# EAGLE board sensor (EAGLE 9.6.2)
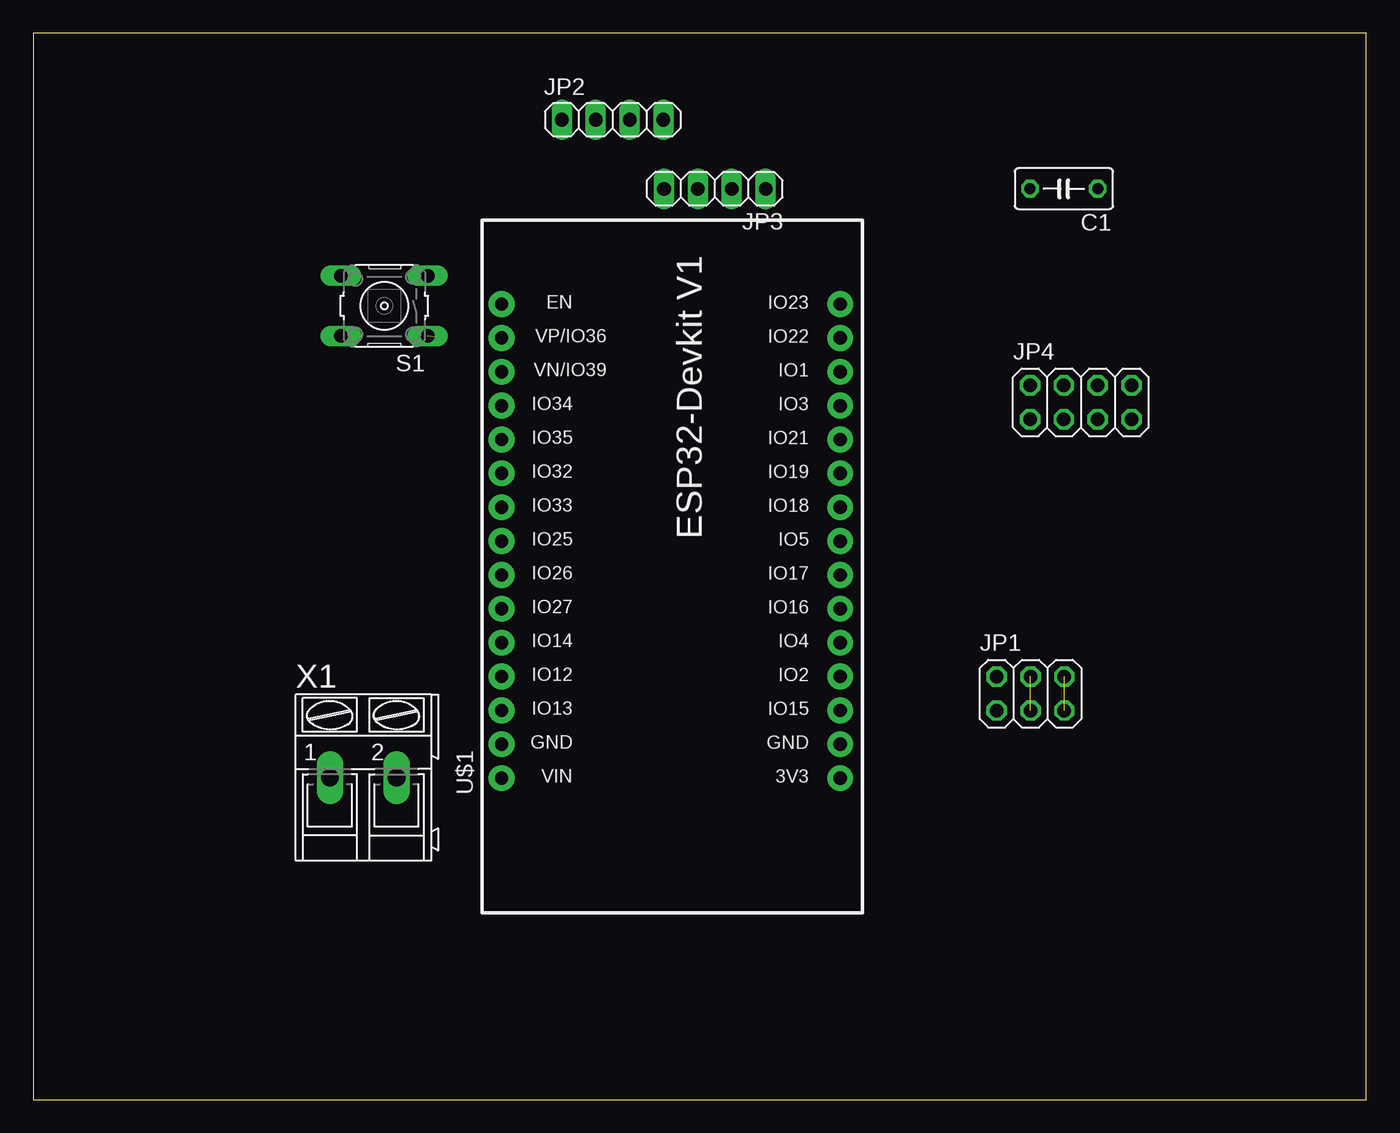
[diagram p0: board, top side]
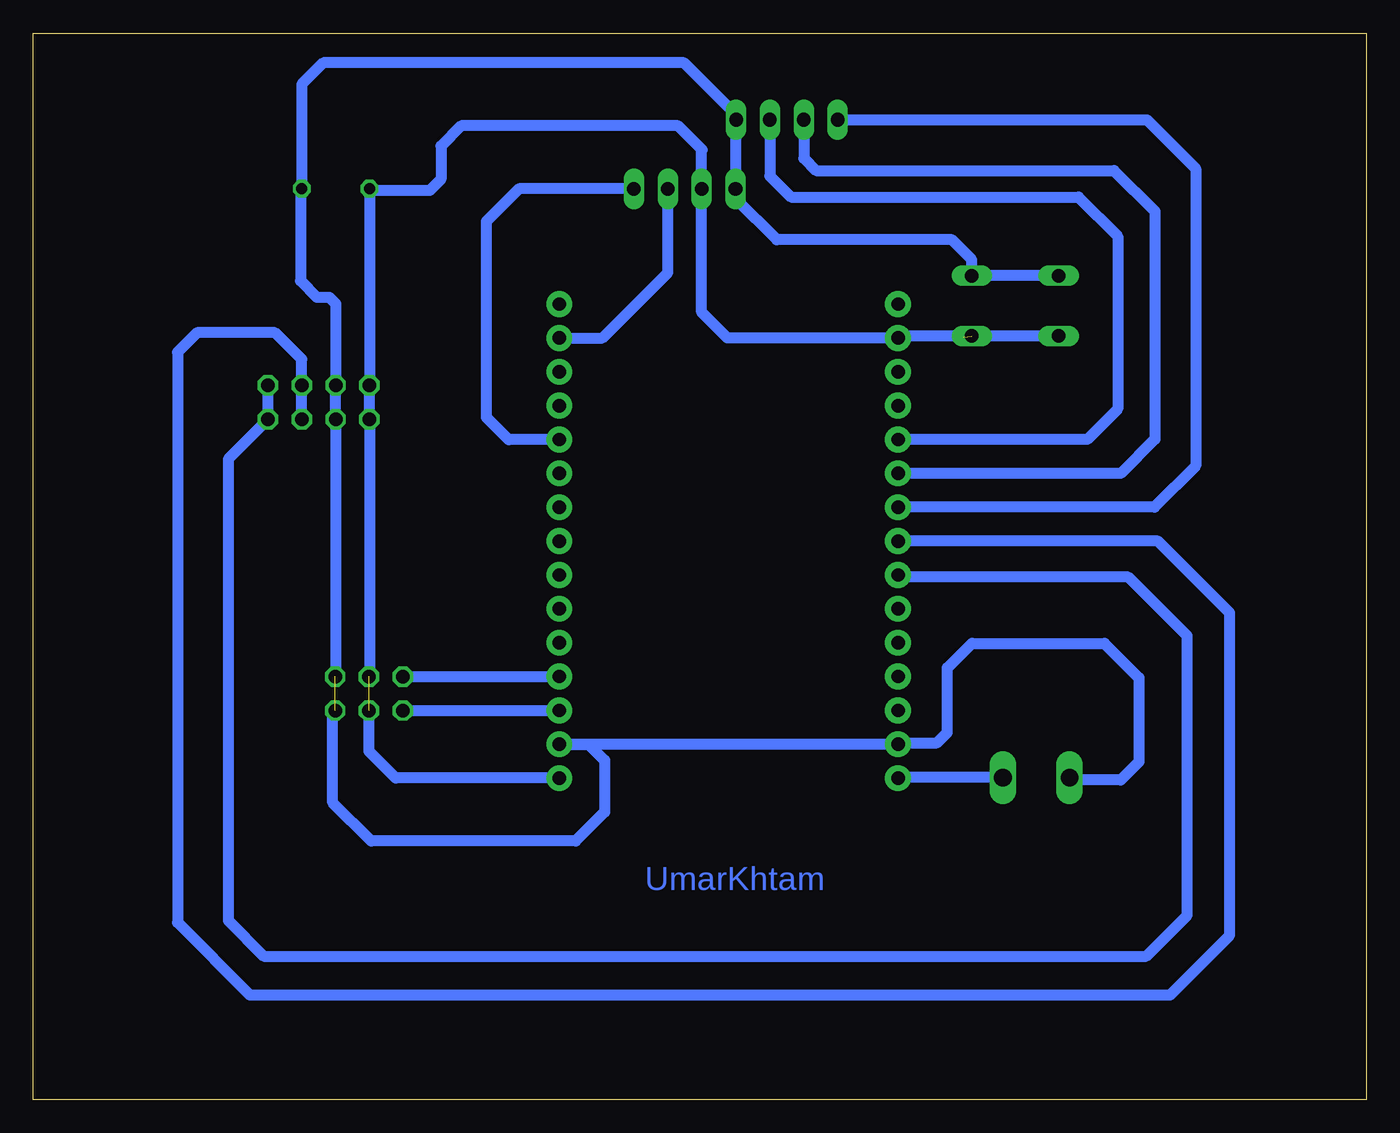
[diagram p1: board, bottom side, seen from below]

Size 100 x 80 mm. Coordinates in mm from the lower left corner, seen from the top.
Outline: 0,0 100,0 100,80 0,80 0,0
Copper layers (1*16): Top 0.035mm / dielectric 1.5mm / Bottom 0.035mm
Design rules "default": minimum track width 6mil, minimum drill 0.35mm, track to track 6mil, track to pad 6mil, pad to pad 6mil, via to via 6mil, smd to smd 6mil, copper to edge 40mil, drill to drill 6mil, minimum pad ring 10mil, minimum via ring 8mil, stop-mask expansion 4mil, vias tented up to drill 0mil, thermal gap 10mil

## Footprints (pad centres in the part's own frame; a part is rotated, then mirrored left to right if it is on the bottom)
C050-030X075 = drill 0.813 octagon: 1 -2.54,0; 2 2.54,0
2X03 = drill 1.016 octagon: 1 -2.54,-1.27; 2 -2.54,1.27; 3 0,-1.27; 4 0,1.27; 5 2.54,-1.27; 6 2.54,1.27
1X04 = drill 1.016 long: 1 -3.81,0; 2 -1.27,0; 3 1.27,0; 4 3.81,0
2X04 = drill 1.016 octagon: 1 -3.81,-1.27; 2 -3.81,1.27; 3 -1.27,-1.27; 4 -1.27,1.27; 5 1.27,-1.27; 6 1.27,1.27; 7 3.81,-1.27; 8 3.81,1.27
B3F-10XX = drill 1.016 long: 1 -3.251,2.261; 2 3.251,2.261; 3 -3.251,-2.261; 4 3.251,-2.261
ESP32-DEVKITV1 = drill 1 pad 1.93: 3V3 -16.52,-12.27; D1 13.96,-12.27; D2 -8.9,-12.27; D3 11.42,-12.27; D4 -6.36,-12.27; D5 1.26,-12.27; D12 -8.9,13.135; D13 -11.44,13.135; D14 -6.36,13.135; D15 -11.44,-12.27; D16 -3.82,-12.27; D17 -1.28,-12.27; D18 3.8,-12.27; D19 6.34,-12.27; D21 8.88,-12.27; D22 16.5,-12.27; D23 19.04,-12.27; D25 1.26,13.135; D26 -1.28,13.135; D27 -3.82,13.135; D32 6.34,13.135; D33 3.8,13.135; D34 11.42,13.135; D35 8.88,13.135; D36 16.5,13.135; D39 13.96,13.135; EN 19.04,13.135; GND@1 -13.98,13.135; GND@2 -13.98,-12.27; VIN -16.52,13.135
AK300/2 = drill 1.321 long: 1 -2.515,0; 2 2.489,0

## Placement (x,y rotation side)
C1  [C050-030X075]  77.32,68.34 180 top
JP1  [2X03]  74.81,30.46 0 top
JP2  [1X04]  43.46,73.52 0 top
JP3  [1X04]  51.13,68.33 180 top
JP4  [2X04]  78.59,52.31 0 top
S1  [B3F-10XX]  26.33,59.55 180 top
U$1  ESP32DEVKITV1  [ESP32-DEVKITV1]  48.26,40.64 90 top
X1  [AK300/2]  24.77,24.15 0 top

## Library data of the parts
C1 = rcl; SPICEPREFIX: C
JP1-JP4 = pinhead
S1 = switch-omron; MPN: B3F-1000; OC_FARNELL: 176432; OC_NEWARK: 36M3542
U$1 = esp32-devkitv1
X1 = con-ptr500; OC_FARNELL: unknown; OC_NEWARK: unknown

## Nets
GND: C1.1 JP1.5 JP1.6 JP2.4 JP3.4 JP4.3 JP4.4 S1.3 S1.4 U$1.GND@1 U$1.GND@2 X1.1
MOISTURE: JP1.2 U$1.D2
OUT1: JP2.1 U$1.D33
OUT2: JP2.2 U$1.D32
OUT3: JP2.3 U$1.D35
PH: JP1.1 U$1.D15
SCL: JP3.2 U$1.D22
SCL2: JP4.5 JP4.6 U$1.D25
SDA: JP3.1 U$1.D21
SDA2: JP4.7 JP4.8 U$1.D26
V: C1.2 JP1.3 JP1.4 JP3.3 JP4.1 JP4.2 S1.1 S1.2 U$1.3V3 U$1.D36
VIN: U$1.VIN X1.2

## Tracks (layer width: path | path; a pad name or v marks a point on that pad's centre or on a via)
GND  (1 unrouted)
  Bottom 0.813: JP3.4 47.27,68.38 | 47.27,68.38 JP2.4 47.27,73.89 51.17,77.79 78.25,77.79 79.86,76.17 C1.1 79.96,68.24 79.96,61.44 78.72,60.2 77.8,60.2 77.32,59.72 JP4.4 JP4.3 77.32,31.77 JP1.6 | 47.27,68.38 47.27,67.56 44.21,64.5 31.07,64.5 29.59,63.02 S1.3 29.31,61.54 29.03,61.54 28.75,61.81 S1.4 | JP1.5 77.53,29.01 77.53,22.27 74.65,19.39 59.31,19.39 57.13,21.57 57.13,25.45 58.34,26.66 U$1.GND@2 U$1.GND@1 35.03,26.76 32.2,26.76 31.43,27.53 31.43,32.39 29.58,34.24 19.64,34.24 17.05,31.64 17.05,25.34 18.41,23.98 22.08,23.98 X1.1
MOISTURE
  Bottom 0.813: JP1.2 60.54,31.73 U$1.D2
OUT1
  Bottom 0.813: JP2.1 16.45,73.52 12.78,69.85 12.78,47.54 15.89,44.44 U$1.D33
OUT2
  Bottom 0.813: U$1.D32 18.41,46.98 15.85,49.54 15.85,66.64 18.91,69.71 41.28,69.71 42.19,70.63 JP2.2
OUT3
  Bottom 0.813: U$1.D35 20.94,49.52 18.64,51.81 18.64,64.77 21.58,67.71 43.15,67.71 44.73,69.3 JP2.3
PH
  Bottom 0.813: JP1.1 60.54,29.19 U$1.D15
SCL
  Bottom 0.813: U$1.D22 57.3,57.14 52.4,62.05 JP3.2
SCL2
  Bottom 0.813: JP4.5 JP4.6 79.86,55.54 81.86,57.54 87.71,57.54 89.18,56.07 89.18,13.28 83.76,7.85 14.71,7.85 10.23,12.33 10.23,36.52 15.62,41.9 U$1.D25
SDA
  Bottom 0.813: JP3.1 63.56,68.33 66,65.89 66,51.18 64.34,49.51 64.33,49.52 U$1.D21
SDA2
  Bottom 0.813: JP4.8 JP4.7 85.38,48.05 85.38,13.43 82.71,10.76 16.5,10.76 13.43,13.83 13.43,34.78 17.85,39.2 34.76,39.2 35.17,38.79 35.17,39.31 U$1.D26
V  (2 unrouted)
  Bottom 0.813: S1.2 30.13,57.29 30.23,57.19 | S1.1 34.97,57.29 U$1.D36 47.92,57.14 49.86,59.08 JP3.3 49.86,71.23 49.82,71.26 51.63,73.06 67.89,73.06 69.42,71.54 69.42,69.04 70.25,68.21 74.65,68.21 C1.2 JP4.2 JP4.1 74.78,31.77 JP1.4 | U$1.3V3 72.81,24.12 74.81,26.13 JP1.3
VIN
  Bottom 0.813: X1.2 35.09,24.15 U$1.VIN

## Text on the board
Bottom: UmarKhtam